# EAGLE board Arduino_NightBlinker (EAGLE 5.10)
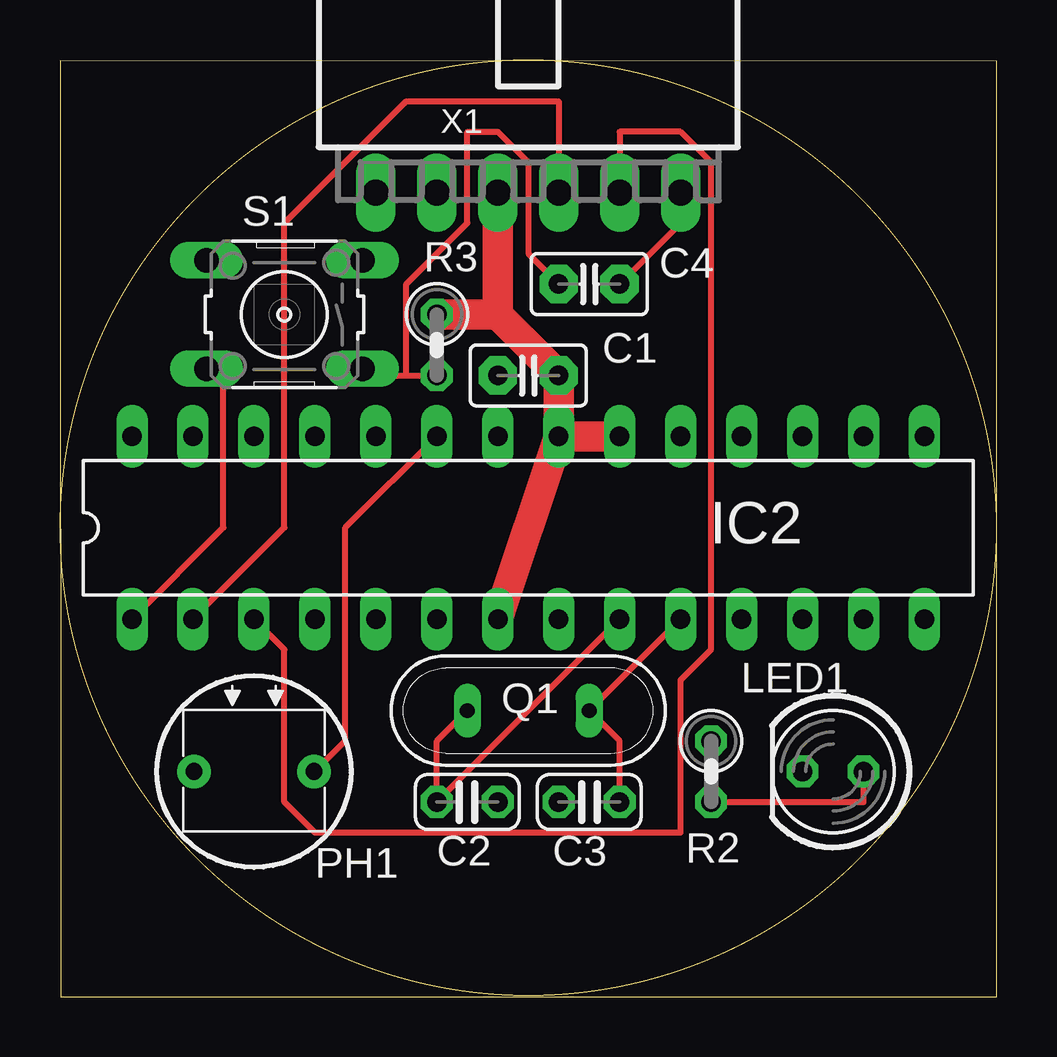
[diagram p0: board, top side]
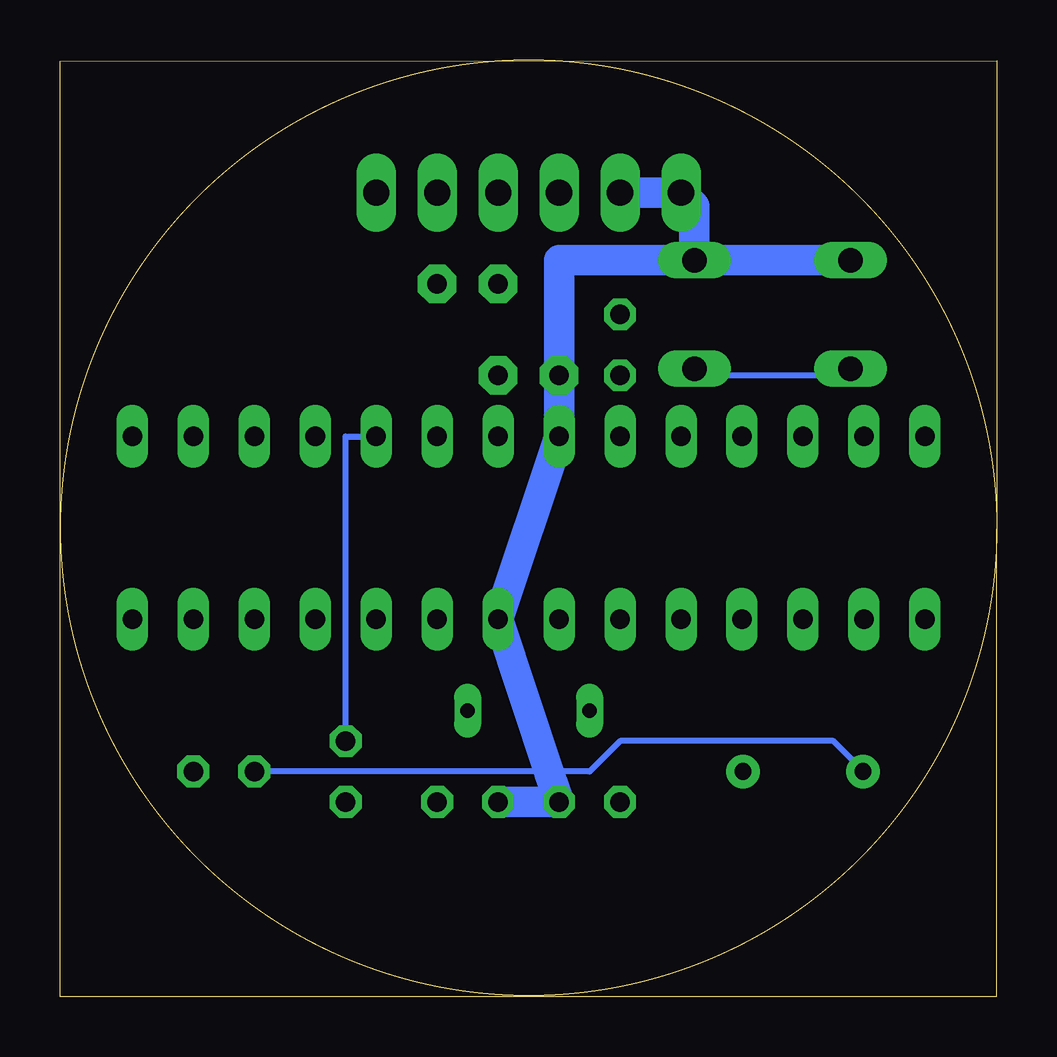
[diagram p1: board, bottom side, seen from below]

Size 39.04 x 39.05 mm. Coordinates in mm from the lower left corner, seen from the top.
Outline: 0.04,0 39.04,0 39.04,39 0,39.03 0.04,0
Outline: circle at 19.51,19.55 radius 19.5
Copper layers (1*16): Top 0.035mm / dielectric 1.5mm / Bottom 0.035mm
Design rules "default": minimum track width 10mil, minimum drill 24mil, track to track 8mil, track to pad 8mil, pad to pad 8mil, via to via 8mil, smd to smd 8mil, copper to edge 40mil, drill to drill 8mil, minimum pad ring 10mil, minimum via ring 8mil, stop-mask expansion 4mil, vias tented up to drill 0mil, thermal gap 10mil
Net classes: 1 GND: width 0.254 mm

## Footprints (pad centres in the part's own frame; a part is rotated, then mirrored left to right if it is on the bottom)
C2.5-2 = drill 0.813 pad 1.6 octagon: 1 -1.27,0; 2 1.27,0
C025-024X044 = drill 0.813 octagon: 1 -1.27,0; 2 1.27,0
DIL28-3 = drill 0.813 long: 1 -16.51,-3.81; 2 -13.97,-3.81; 3 -11.43,-3.81; 4 -8.89,-3.81; 5 -6.35,-3.81; 6 -3.81,-3.81; 7 -1.27,-3.81; 8 1.27,-3.81; 9 3.81,-3.81; 10 6.35,-3.81; 11 8.89,-3.81; 12 11.43,-3.81; 13 13.97,-3.81; 14 16.51,-3.81; 15 16.51,3.81; 16 13.97,3.81; 17 11.43,3.81; 18 8.89,3.81; 19 6.35,3.81; 20 3.81,3.81; 21 1.27,3.81; 22 -1.27,3.81; 23 -3.81,3.81; 24 -6.35,3.81; 25 -8.89,3.81; 26 -11.43,3.81; 27 -13.97,3.81; 28 -16.51,3.81
LED5MM = drill 0.813 octagon: A -1.27,0; K 1.27,0
D11XX = drill 0.7 pad 1.4 round: 1 -2.5,0; 2 2.5,0
QS = drill 0.61 long: 1 -2.54,0; 2 2.54,0
0207/2V = drill 0.813 octagon: 1 -1.27,0; 2 1.27,0
B3F-10XX = drill 1.016 long: 1 -3.251,2.261; 2 3.251,2.261; 3 -3.251,-2.261; 4 3.251,-2.261
70553-06 = drill 1.092 long: 1 -6.35,-7.62; 2 -3.81,-7.62; 3 -1.27,-7.62; 4 1.27,-7.62; 5 3.81,-7.62; 6 6.35,-7.62

## Placement (x,y rotation side)
C1  100nF  [C2.5-2]  19.51,25.9 0 top
C2  22p  [C025-024X044]  16.97,8.12 180 top
C3  22p  [C025-024X044]  22.05,8.12 0 top
C4  100nF  [C2.5-2]  22.05,29.71 0 top
IC2  Atmega168-20  [DIL28-3]  19.51,19.55 0 top
LED1  [LED5MM]  32.21,9.39 180 top
PH1  D1160_12  [D11XX]  8.08,9.39 180 top
Q1  8MHz  [QS]  19.51,11.93 180 top
R2  220  [0207/2V]  27.13,9.39 270 top
R3  10k  [0207/2V]  15.7,27.17 270 top
S1  [B3F-10XX]  9.35,28.44 180 top
X1  C-GRID-06-70553  [70553-06]  19.51,41.14 0 top

## Library data of the parts
C1 C4 = capacitor-wima
C2 C3 R2 R3 = rcl
IC2 = atmel
LED1 = led
PH1 = photo-elements
Q1 = special
S1 = switch-omron
X1 = con-molex

## Nets
-RESET: C4.1 IC2.1 R3.2 S1.1 S1.2
A0: IC2.23 PH1.1
CRYSTAL1: C2.2 IC2.9 Q1.2
CRYSTAL2: C3.2 IC2.10 Q1.1
D13: IC2.19 R2.1
DTR: C4.2 X1.6
GND: C1.1 C2.1 C3.1 IC2.8 IC2.22 LED1.K PH1.2 S1.3 S1.4 X1.1 X1.2
RLED1: LED1.A R2.2
RXI: IC2.2 X1.4
TXO: IC2.3 X1.5
VCC: C1.2 IC2.7 IC2.20 IC2.21 R3.1 X1.3

## Tracks (layer width: path | path; a pad name or v marks a point on that pad's centre or on a via)
-RESET
  Top 0.254: IC2.1 6.81,19.55 6.81,25.9 S1.2 | 14.43,25.9 13.16,25.9 S1.1 | 14.43,25.9 R3.2 | C4.1 19.51,30.98 19.51,34.79 18.24,36.06 16.97,36.06 16.97,32.25 14.43,29.71 14.43,25.9
  Bottom 0.254: S1.2 6.81,25.9 11.89,25.9 S1.1
A0
  Top 0.254: IC2.23 11.89,19.55 11.89,10.66 10.62,9.39 PH1.1
CRYSTAL1
  Top 0.254: Q1.2 15.7,10.66 C2.2 IC2.9
CRYSTAL2
  Top 0.254: C3.2 23.32,10.66 Q1.1 IC2.10
D13
  Bottom 0.254: R2.1 27.13,23.36 IC2.19
DTR
  Top 0.254: C4.2 25.86,32.25 X1.6
GND
  Bottom 0.254: 18.24,9.39 LED1.K | 18.24,9.39 16.97,9.39 15.7,10.66 6.81,10.66 5.54,9.39 PH1.2 | 18.24,9.39 18.62,9.27
  Bottom 1.27: S1.3 S1.4 | S1.3 12.6,32.97 X1.1 X1.2 | S1.3 18.24,30.71 C1.1 IC2.22 IC2.8 18.62,9.27 C2.1 C3.1
RLED1
  Top 0.254: R2.2 33.48,8.12 LED1.A
RXI
  Top 0.254: IC2.2 9.35,19.55 9.35,32.25 14.43,37.33 20.78,37.33 X1.4
TXO
  Top 0.254: IC2.3 9.35,14.47 9.35,8.12 10.62,6.85 25.86,6.85 25.86,13.2 27.13,14.47 27.13,34.79 25.86,36.06 23.32,36.06 X1.5
VCC
  Top 1.27: 18.24,28.44 X1.3 | 18.24,28.44 R3.1 | 18.24,28.44 C1.2 IC2.21 | IC2.21 IC2.20 | IC2.7 IC2.21